# Altium PCB Breakout_4pin.PcbDoc
Units mil, origin at the board's own origin, x right, y up, seen from the top; angles counter-clockwise.
Board outline 2165.35 x 984.25 mil, 2 copper layers (Top Layer, Bottom Layer), stack 61.855 mil thick; 7 components, 4 nets, 20 pads, 0 vias.
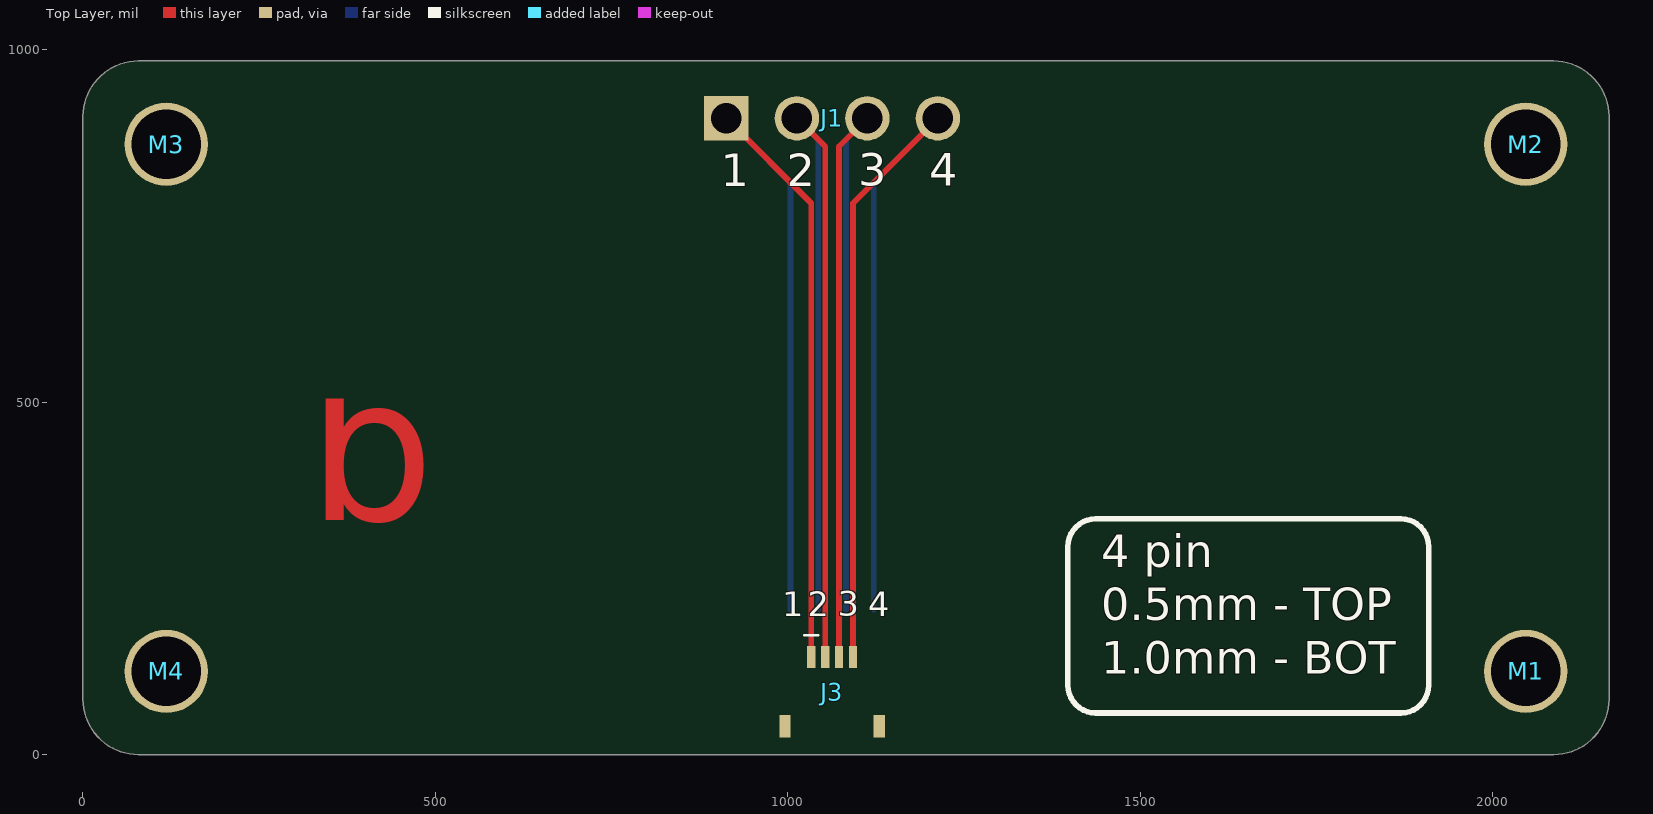
[diagram p0: Top Layer view]
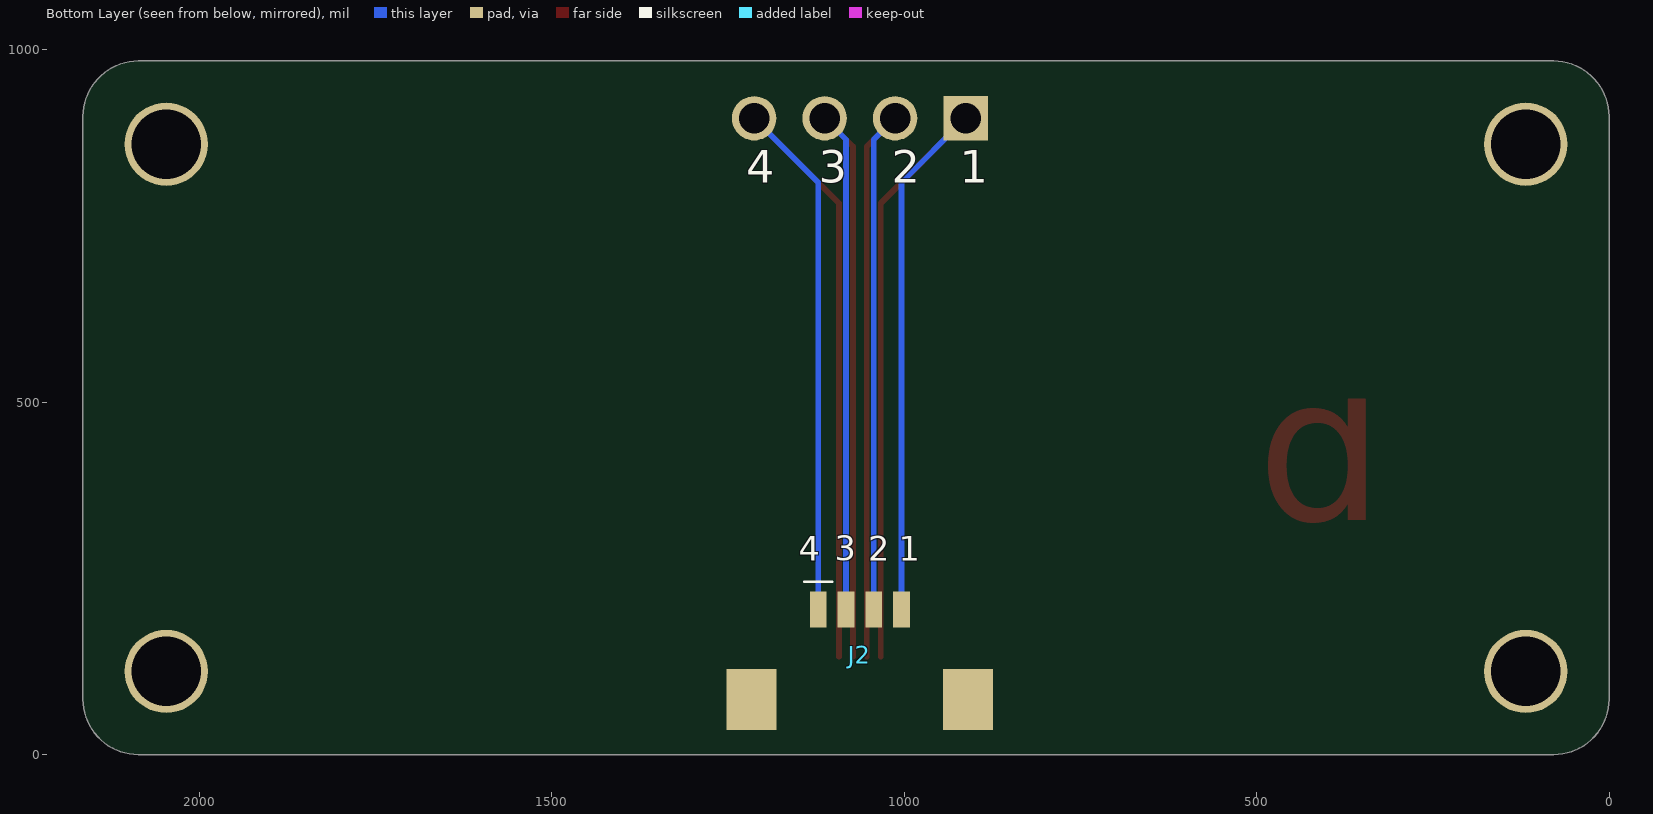
[diagram p1: Bottom Layer view, seen from below]

## Layer stack, top to bottom
Top Solder: solder mask 0.4, Solder Resist, Dk 3.5
Top Layer: signal copper 1.4
Dielectric 1: dielectric 59.0551, FR-4, Dk 4.8
Bottom Layer: signal copper 1.4
Bottom Solder: solder mask 0.4, Solder Resist, Dk 3.5

## Board outline
78.74,0 cw(c78.74,78.74) 0,78.74 0,905.51 cw(c78.74,905.51) 78.74,984.25 2086.61,984.25 cw(c2086.61,905.51) 2165.35,905.51 2165.35,78.74 cw(c2086.61,78.74) 2086.61,0

## Design rules (kind name [scope] priority, off if disabled: settings)
Clearance [All] p1: gap=8.03 ignorepadtopadclearanceinfootprint=TRUE
DiffPairsRouting [All] p1: maxlimit=10 minlimit=2.5 mostfreqgap=5 toplayer_minwidth=7 toplayer_maxwidth=18 toplayer_prefwidth=18 bottomlayer_minwidth=7 bottomlayer_maxwidth=18 bottomlayer_prefwidth=18 impedanceprofiledriven=TRUE maxuncoupledlength=500
HoleSize [All] p1: absolutevalues=TRUE maxlimit=196.85 minlimit=6.02 maxpercent=80.000 minpercent=20.000
MinimumSolderMaskSliver [All] p1: minsoldermaskwidth=7
PolygonConnect [All] p1: connectstyle=Relief reliefconductorwidth=10 reliefentries=4 polygonreliefangle="90 Angle" airgapwidth=10
RoutingVias [All] p1: holewidth=12.01 width=24.02 viastyle="Through Hole" minholewidth=10 minwidth=20 maxholewidth=19.68 maxwidth=50
SolderMaskExpansion [All] p1: expansion=4 istentingtop=FALSE
Width [All] p1: maxlimit=1000 minlimit=8.03 preferedwidth=10 minimp=50.000000 maximp=50.000000 favimp=50.000000
27 further rules are at their usual default settings.

## Components (designator, comment, footprint, x,y, rotation, side; value= is the part's Value field where it differs from the comment)
J1 "61300411121" HDR-V-1X4 1062.99,902.96 r0 top
J2 "XF3M(1)-0415-1B" CONN-FFC-H-4P-1MM 1062.99,150.75 r180 bottom
J3 "FFC2B28-04-G" CONN-FFC-H-4P-0.5MM 1062.99,89.46 r0 top
M1 "MTG_HOLE" MH_P_2.5MM 2047.24,118.11 r90 top
M2 "MTG_HOLE" MH_P_2.5MM 2047.24,866.14 r90 top
M3 "MTG_HOLE" MH_P_2.5MM 118.11,866.14 r90 top
M4 "MTG_HOLE" MH_P_2.5MM 118.11,118.11 r90 top

## Footprints (in the part's own frame and the unit in brackets; to place one, negate y for a bottom-side part, rotate by r counter-clockwise, add the part's x,y. Pads: shape width x height; smd on the part's side, far side on the other; paste and mask are expansions set on the pad)
CONN-FFC-H-4P-0.5MM [mm]
  rect 0.3x0.8 smd: 1(-0.75,1.25) 2(-0.25,1.25) 3(0.25,1.25) 4(0.75,1.25)
  rect 0.4x0.8 smd: ME1(-1.7,-1.25) ME2(1.7,-1.25)
  silkscreen extent -1,2.03 -0.5,2.03, body extent -2,-1.8 2,1.45, height 1.76
CONN-FFC-H-4P-1MM [mm]
  rect 0.6x1.3 smd: 1(-1.5,1.4) 2(-0.5,1.4) 3(0.5,1.4) 4(1.5,1.4)
  rect 1.8x2.2 smd: ME1(-3.9,-1.85) ME2(3.9,-1.85)
  silkscreen extent -2,2.4 -1,2.4, body extent -4.3,-3.9 4.3,2.5, height 2.01
HDR-V-1X4 [mm]
  rect 1.6x1.6 hole 1.1: 1(-3.81,0)
  round 1.6 hole 1.1: 2(-1.27,0) 3(1.27,0) 4(3.81,0)
  body extent -5.08,-1.27 5.08,1.27, height 8.55
MH_P_2.5MM [mm]
  round 3 hole 2.5: 1(0,0)

## Part data
J1: library part HDR-V-1X4-M, "Header, 4-Pin, 0.1\"", Color=Black, Manufacturer 1="Wurth Electronics", Supplier Part Number 1=732-5317-ND, ComponentLink1Description=http://www.farnell.com/cad/1737268.pdf, ComponentLink1URL=http://www.farnell.com/cad/1737268.pdf, ComponentLink2Description=http://katalog.we-online.de/em/datasheet/6130xx11121.pdf, ComponentLink2URL=http://katalog.we-online.de/em/datasheet/6130xx11121.pdf, ComponentLink3Description=http://www.farnell.com/cad/1737268.pdf?src-supplier=Element14, ComponentLink3URL=http://www.farnell.com/cad/1737268.pdf?src-supplier=Element14, ComponentLink4Description=https://katalog.we-online.de/em/datasheet/6130xx11121.pdf?src-supplier=Digi-Key, ComponentLink4URL=https://katalog.we-online.de/em/datasheet/6130xx11121.pdf?src-supplier=Digi-Key, Connector Type="Male Pin", Contact Material=Copper, Contact Mating Length=0.236inch, Contact Plating=Gold, Gender=Male, Lead Free="Lead Free", Manufacturer Part Number 1=61300411121, Mount="Through Hole", Number of Contacts=4, Number of Positions=4, Number of Rows=1, Packaging=Bulk, Pitch=0.1inch, Pricing 1="1=0.18000, 10=0.15300, 25=0.12720, 50=0.10600, 100=0.09600, 1000=0.08800 (USD)", REACH SVHC=Unknown, RoHS=Yes, Stock 1=25747, Supplier 1=Digi-Key, Termination=Solder
J2: library part CONN-FFC-H-4P-1MM, "FFC & FPC Connectors RotaryBackLock 1.0mm Dual Contact 4pin", Actuator Color=Black, Current Rating=500mA, Flammability Rating="UL94 V-0", Housing Color=Natural, Insulation Resistance=100MR, Manufacturer 1=Omron, Max Operating Temperature=85°C, Min Operating Temperature=-30°C, Package Quantity=1, Voltage Rating=50V, Actuator Material="Polymer,Liquid Crystal Polymer", Category="FFC / FPC", ComponentLink1Description=https://datasheet.ciiva.com/29758/xf3m-0813-29758592.pdf?src-supplier=Digi-Key, ComponentLink1URL=https://datasheet.ciiva.com/29758/xf3m-0813-29758592.pdf?src-supplier=Digi-Key, ComponentLink2Description=https://datasheet.ciiva.com/29758/xf3m-0813-29758601.pdf?src-supplier=Digi-Key, ComponentLink2URL=https://datasheet.ciiva.com/29758/xf3m-0813-29758601.pdf?src-supplier=Digi-Key, ComponentLink3Description=https://datasheet.ciiva.com/43511/xf3m-0813-43511125.pdf?src-supplier=Onlinecomponents.com, ComponentLink3URL=https://datasheet.ciiva.com/43511/xf3m-0813-43511125.pdf?src-supplier=Onlinecomponents.com, Contact Location=Dual, Contact Material="Copper Alloy", Contact Plating=Gold, Gender=Female, Housing Material=Polymer, Lead Free="Lead Free", Manufacturer Part Number 1=XF3M(1)-0415-1B, Mating Cycles=20, Mounting Technology="Surface Mount", Number of Contacts=4, Number of Positions=4, Number of Rows=1, Orientation="Right Angle", Packaging="Tape and Reel", Pitch=1mm, Pricing 1="1500=0.6934, 3000=0.542, 6000=0.5365, 12000=0.5311, 15000=0.5257, 24000=0.5204, 30000=0.5152 (USD)", Radiation Hardening=No, RoHS=Yes, RoHS Compliant=Yes, Series=XF3M, Stock 1=10500, Supplier 1="Arrow Electronics", Supplier Part Number 1=XF3M(1)-0415-1B, Termination=Solder
J3: library part CONN-FFC-H-4P-0.5MM, "4W, 0.5MM Ffc Con, R/a, Dual Cont", Manufacturer 1="Global Connector Technology", Supplier Part Number 1=90AJ6003, Category=Connectors, Manufacturer Part Number 1=FFC2B28-04-G, Pricing 1="4000=0.276, 5000=0.253 (USD)", RoHS=No, Stock 1=4000, Supplier 1=Newark
M1 M2 M3 M4: "MTG HOLE PLATED VARIOUS SIZES"

## Nets (pads, with @x,y where several pads share a name; then routed paths per layer and width w, separated by ;. In a path a pad name is that pad's centre, name@x,y a point inside that pad or via, vN(x,y) a via of type N, cw(c..) or ccw(c..) an arc to the next point about the centre after c; other vN are vias at no path point)
NetJ1_1: J1.1 J2.4 J3.1 | length 1548.9
  Top Layer w8.03: J1.1 1033.46,782.48 J3.1
  Bottom Layer w8.03: J1.1 1003.94,812.01 J2.4
NetJ1_2: J1.2 J2.3 J3.2 | length 1490.6
  Top Layer w8.03: J1.2 1053.15,862.8 J3.2
  Bottom Layer w8.03: J1.2 1043.31,872.64 J2.3
NetJ1_3: J1.3 J2.2 J3.3 | length 1490.6
  Top Layer w8.03: J3.3 1072.83,862.8 J1.3
  Bottom Layer w8.03: J2.2 1082.68,872.64 J1.3
NetJ1_4: J1.4 J2.1 J3.4 | length 1548.9
  Top Layer w8.03: J3.4 1092.52,782.48 J1.4
  Bottom Layer w8.03: J2.1 1122.05,812.01 J1.4
pads on no net: J2.ME1 J2.ME2 J3.ME1 J3.ME2 M1.1 M2.1 M3.1 M4.1

## Other copper
Top Layer:
  text "b" at 318.9,220.47 h590.55

## Silkscreen, mask and mechanical layers (free items; w line width, h text height)
Top Overlay:
  lines w7.87: 1397.64,98.43 ccw(c1437.01,98.43) 1437.01,59.06 1870.08,59.06 ccw(c1870.08,98.43) 1909.45,98.43 1909.45,295.28 ccw(c1870.08,295.28) 1870.08,334.65 1437.01,334.65 ccw(c1437.01,295.28) 1397.64,295.28 1397.64,98.43 ; 1397.64,98.43 1397.64,98.43
  text "3" at 1099.88,791.7 h78.74
  text "1" at 905.12,791.25 h78.74
  text "2" at 998.78,791.25 h78.74
  text "4" at 1200.79,791.34 h78.74
  text "4 pin" at 1444.88,250.2 h78.74
  text "3" at 1071.27,185.72 h59.06
  text "1" at 992.13,185.04 h59.06
  text "2" at 1028.15,185.04 h59.06
  text "4" at 1114.17,185.04 h59.06
  text "0.5mm - TOP" at 1444.88,174.73 h78.74
  text "1.0mm - BOT" at 1444.88,99.26 h78.74
  text "c" at 124.16,-459.06 h1968.5
Bottom Overlay:
  text "1" at 921.26,795.73 h78.74
  text "2" at 1017.49,795.73 h78.74
  text "3" at 1121.01,796.19 h78.74
  text "4" at 1224.41,795.82 h78.74
  text "1" at 1007.87,263.78 h59.06
  text "2" at 1051.24,263.78 h59.06
  text "3" at 1098.83,264.46 h59.06
  text "4" at 1149.61,263.78 h59.06
Board Outline:
  lines w3.94: 1062.99,984.25 1082.68,984.25 ; 0,78.74 ccw(c78.74,78.74) 78.74,0 2086.61,0 ccw(c2086.61,78.74) 2165.35,78.74 2165.35,905.51 ccw(c2086.61,905.51) 2086.61,984.25 78.74,984.25 ccw(c78.74,905.51) 0,905.51 0,78.74